# Altium PCB seriesrelay_noprotection.PcbDoc
Units mm, origin at the board's own origin, x right, y up, seen from the top; angles counter-clockwise.
Board outline 40.63 x 56.02 mm, 2 copper layers (Top Layer, Bottom Layer); 8 components, 12 nets, 34 pads, 0 vias.
Unrouted connection lines stored in the file: 2.
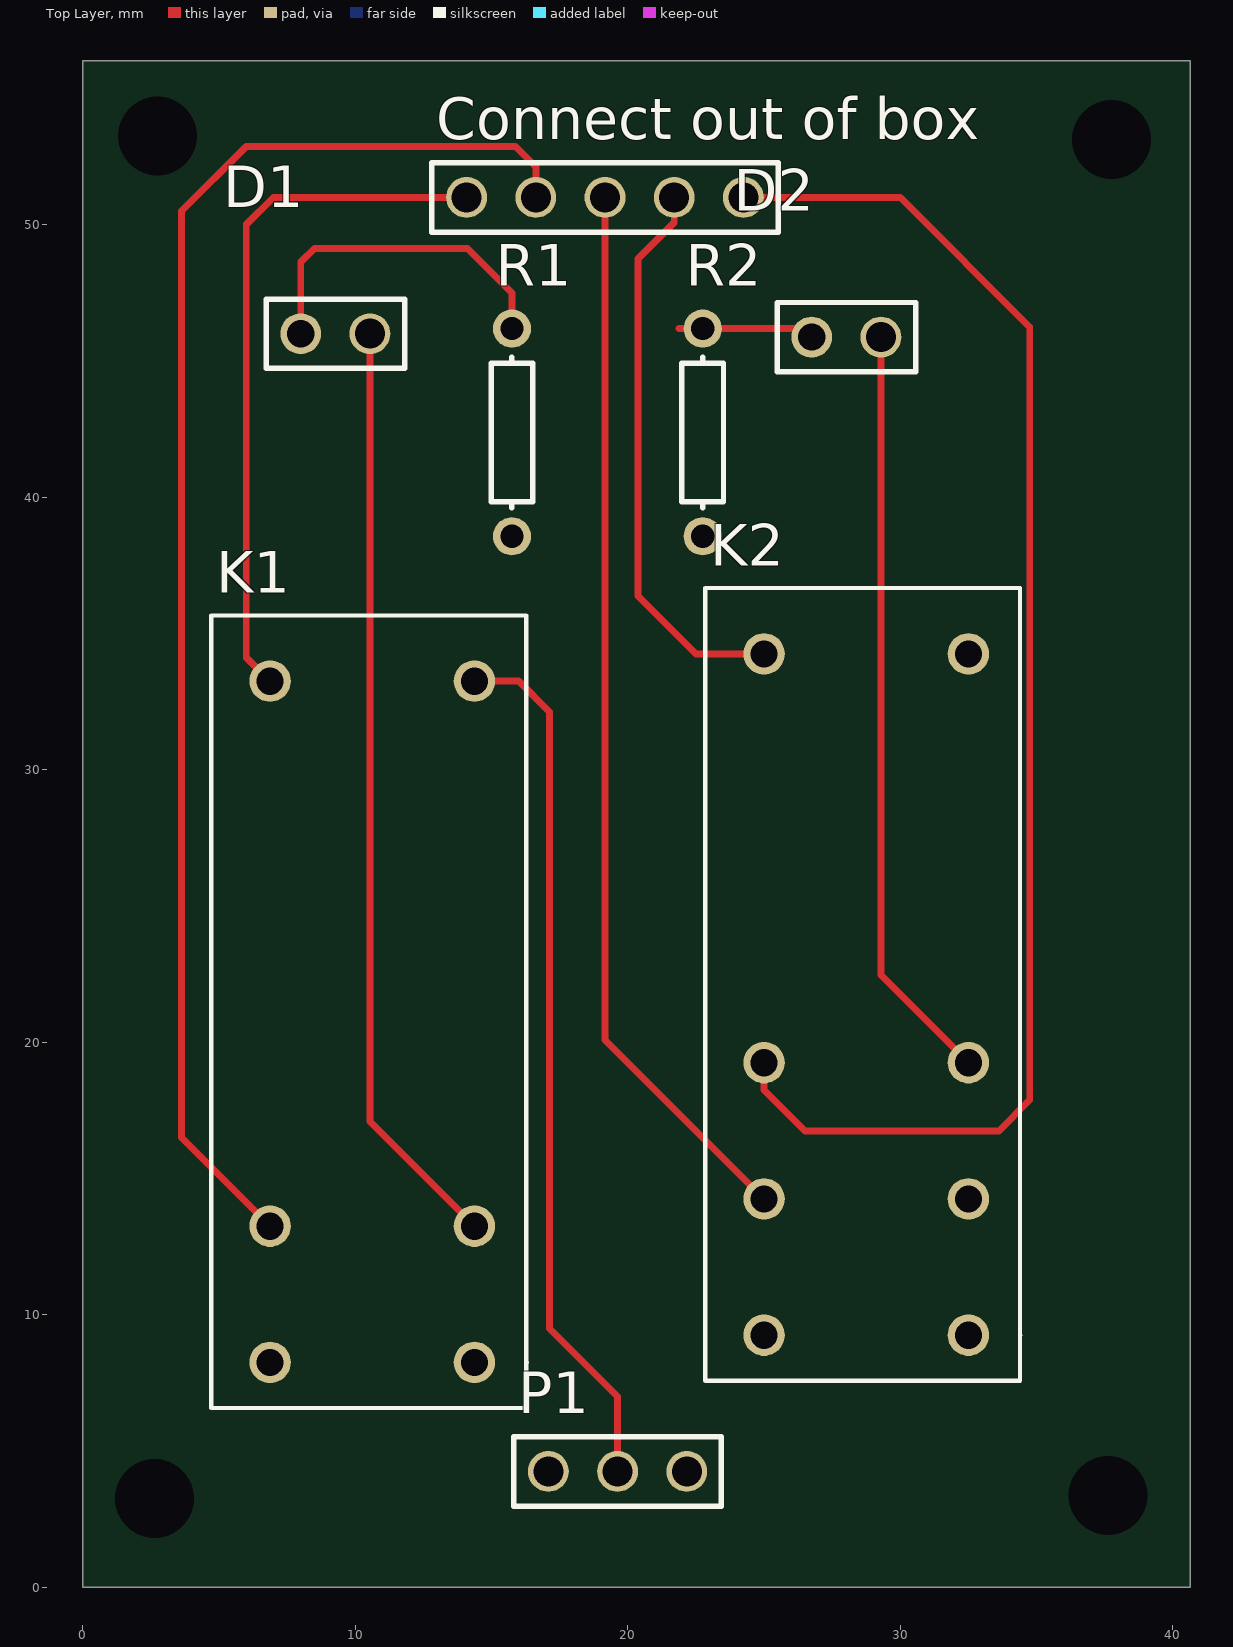
[diagram p0: Top Layer view]
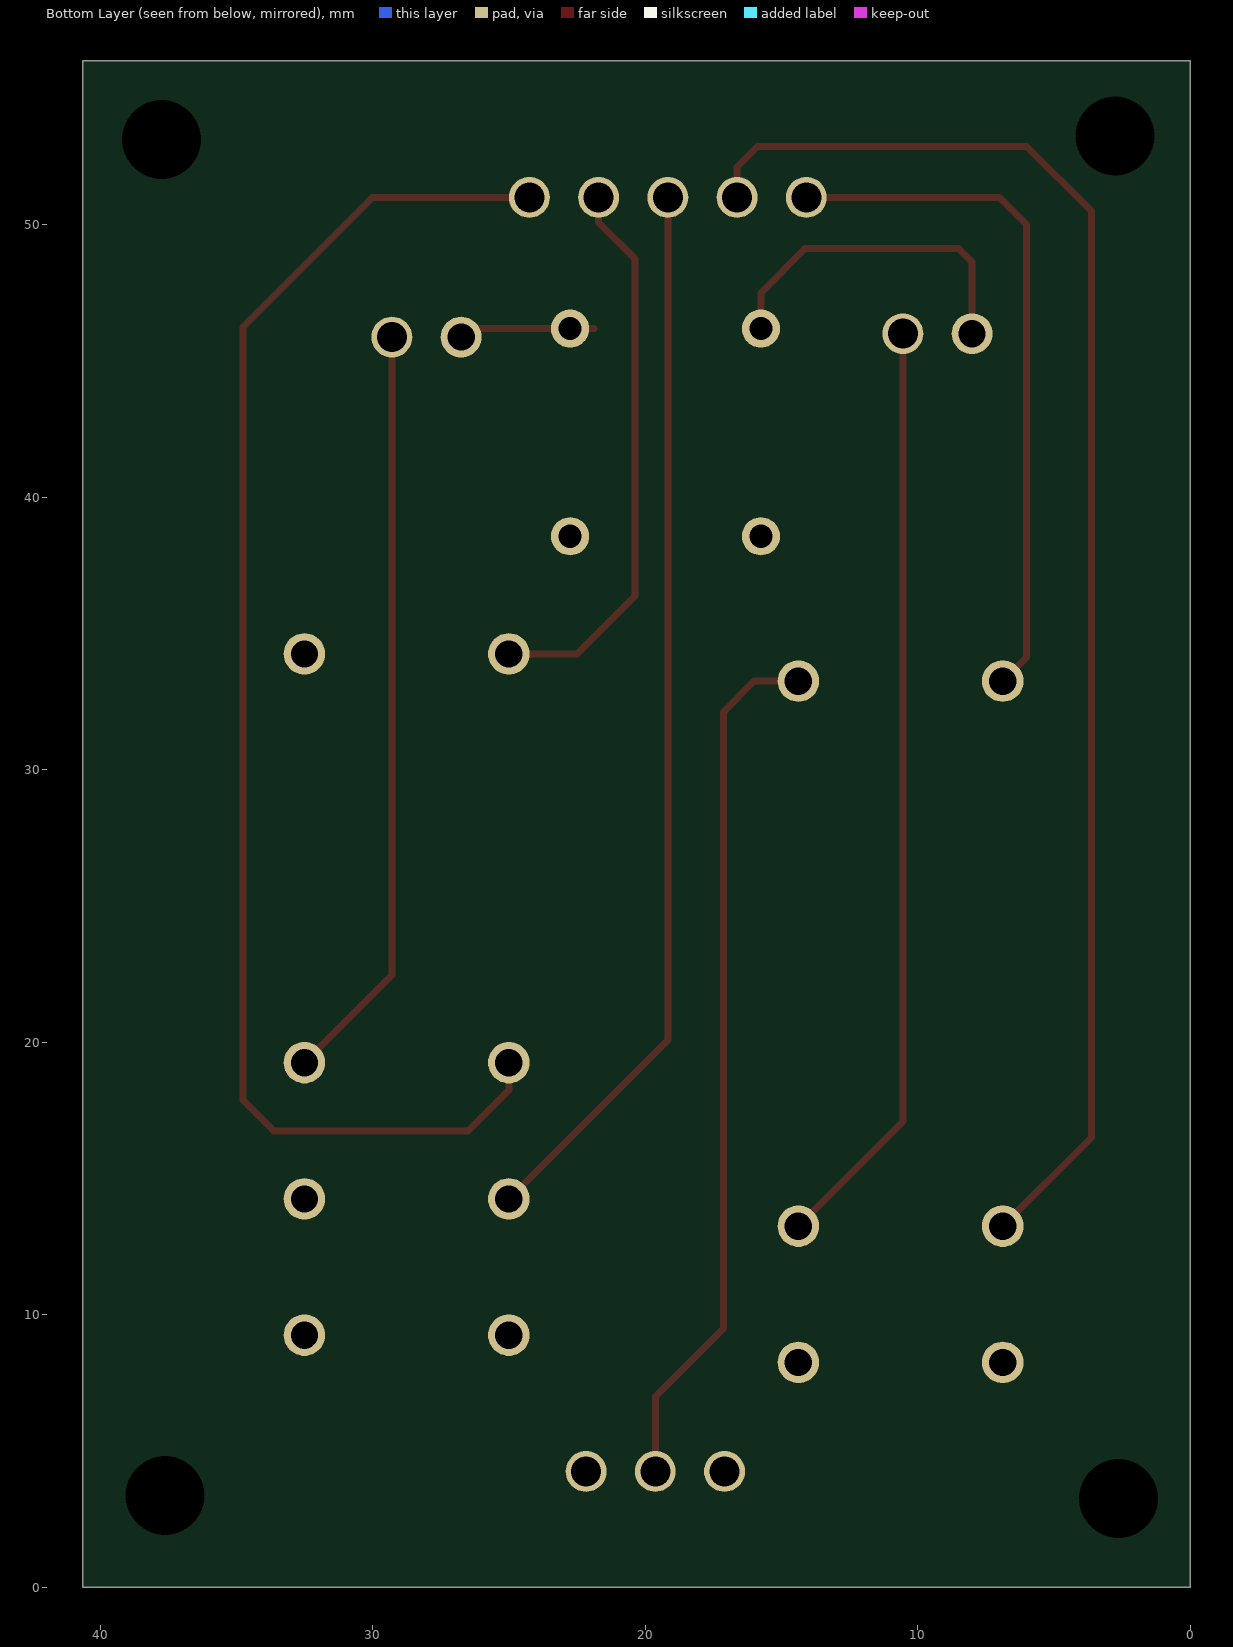
[diagram p1: Bottom Layer view, seen from below]

## Layer stack, top to bottom
Top Solder: solder mask 0.0102, Solder Resist, Dk 3.5
Top Layer: signal copper 0.0356
Dielectric1: dielectric 0.32, FR-4, Dk 4.8
Bottom Layer: signal copper 0.0356
Bottom Solder: solder mask 0.0102, Solder Resist, Dk 3.5

## Board outline
0,0 0,56.016 40.635,56.016 40.635,0

## Design rules (kind name [scope] priority, off if disabled: settings)
Clearance [All] p1: gap=0.254
FabricationTestPointUsage TestPointUsage [All] p1: valid=0 allowmultiple=FALSE
FabricationTestpoint Testpoint [All] p1: side=3 testpointundercomponent=TRUE minsize=1.016 maxsize=2.54 preferedsize=1.524 minholesize=0 maxholesize=1.016 preferedholesize=0.813 testpointgrid=0.025 allowsidetop=TRUE allowsidebottom=TRUE usegrid=TRUE gridtolerance=0
PolygonConnect [All] p1: connectstyle=Relief reliefconductorwidth=0.254 reliefentries=4 polygonreliefangle="90 Angle" airgapwidth=0.254
RoomDefinition series_noprotection [InComponentClass('series_noprotection')] p1: confinementstyle=ConfineIn formatcopy=TRUE lockcomponents=FALSE outline 55,1.19 160,1.19 160,35 55,35
RoutingVias [All] p1: holewidth=0.711 width=1.27 viastyle="Through Hole" minholewidth=0.711 minwidth=1.27 maxholewidth=0.711 maxwidth=1.27
SilkToSolderMaskClearance SilkscreenOverComponentPads [IsPad] p1: minsilkscreentomaskgap=0.254 clearancetoexposedcopper=TRUE
SolderMaskExpansion [All] p1: expansion=0.102
Width [All] p1: maxlimit=0.254 minlimit=0.254 preferedwidth=0.254
27 further rules are at their usual default settings.

## Components (designator, comment, footprint, x,y, rotation, side; value= is the part's Value field where it differs from the comment)
"Connect out of box" "Header 5_custom" TE5 14.085,51 r0 top
D1 "LED_custom" LED_Custom 8,46 r0 top
D2 "LED_custom" LED_Custom 26.75,45.875 r0 top
K1 "Relay-DPST_custom" Relay-DPST_custom -1131.045,-1189.887 r0 top
K2 "Relay-DPDT_custom" Relay-DPDT_custom -1112.92,-1188.887 r0 top
P1 "Header 3_custom" TB3 22.165,4.25 r180 top
R1 "Res1" AXIAL-0.3 15.75,42.375 r270 top
R2 "Res1" AXIAL-0.3 22.75,42.375 r270 top

## Footprints (in the part's own frame and the unit in brackets; to place one, negate y for a bottom-side part, rotate by r counter-clockwise, add the part's x,y. Pads: shape width x height; smd on the part's side, far side on the other; paste and mask are expansions set on the pad)
AXIAL-0.3 [mm] "Axial Device, Thru-Hole; 2 Leads; 0.3 in Pin Spacing"
  round 1.4 hole 0.85: 1(-3.81,0) 2(3.81,0)
  silkscreen extent -2.77,-0.76 2.77,0.76
LED_Custom [mm] "LED-round pins"
  round 1.5 hole 1: 1(0,0)
  round 1.5 hole 1.1: 2(2.54,0)
  silkscreen extent -1.27,-1.27 3.81,1.27
Relay-DPDT_custom [mil]
  round 60 hole 39.37: 1(44800,48155) 2(44800,47564.45) 3(44800,47367.6) 4(44800,47170.75) 5(45095.28,47170.75) 6(45095.28,47367.6) 7(45095.28,47564.45) 8(45095.28,48155)
  silkscreen extent 44715,47105 45171,48250
Relay-DPST_custom [mil]
  round 60 hole 39.37: 1(44800,48155) 2(44800,47367.6) 3(44800,47170.75) 4(45095.28,47170.75) 5(45095.28,47367.6) 6(45095.28,48155)
  silkscreen extent 44715,47105 45171,48250
TB3 [mm] "Connector; terminalbock; 3 Position"
  round 1.5 hole 1.1: 1(0,0) 2(2.54,0) 3(5.08,0)
  silkscreen extent -1.27,-1.27 6.35,1.27
TE5 [mm] "Connector; Terminalblock; 5 Position"
  round 1.5 hole 1.1: 1(0,0) 2(2.54,0) 3(5.08,0) 4(7.62,0) 5(10.16,0)
  silkscreen extent -1.27,-1.27 11.43,1.27

## Part data
"Connect out of box": "Header, 5-Pin"
D1 D2: "Typical INFRARED GaAs LED"
K1: "Dual-Pole Single-Throw Relay"
K2: "Dual-Pole Dual-Throw Relay"
P1: "Header, 3-Pin"
R1 R2: "Resistor"

## Free pads (board coordinates)
  round 1.524 hole 2.9: 2(37.75,53.125) 3(37.625,3.375) 6(2.625,3.25) 7(2.75,53.25)

## Nets (pads, with @x,y where several pads share a name; then routed paths per layer and width w, separated by ;. In a path a pad name is that pad's centre, name@x,y a point inside that pad or via, vN(x,y) a via of type N, cw(c..) or ccw(c..) an arc to the next point about the centre after c; other vN are vias at no path point)
"NetConnect out of box_1": "Connect out of box.1" K1.1 | length 25.6
  Top Layer w0.254: K1.1 6,34.125 6,50 7,51 14.085,51
"NetConnect out of box_2": "Connect out of box.2" K1.2 | length 54
  Top Layer w0.254: K1.2 3.625,16.5 3.625,50.5 6,52.875 15.875,52.875 16.625,52.125 16.625,51
"NetConnect out of box_3": "Connect out of box.3" K2.3 | length 39.2
  Top Layer w0.254: 19.165,51 19.165,20.085 K2.3
"NetConnect out of box_4": "Connect out of box.4" K2.1 | length 20.7
  Top Layer w0.254: 21.705,51 21.705,50.08 20.375,48.75 20.375,36.375 22.5,34.25 K2.1
"NetConnect out of box_5": "Connect out of box.5" K2.2 | length 52.7
  Top Layer w0.254: 24.245,51 30,51 34.75,46.25 34.75,17.875 33.625,16.75 26.5,16.75 25,18.25 K2.2
NetD1_1: D1.1 R1.1 | length 12.6
  Top Layer w0.254: D1.1 8,48.625 8.5,49.125 14.125,49.125 15.75,47.5 R1.1
NetD1_2: D1.2 K1.5 | length 34.3
  Top Layer w0.254: D1.2 10.54,17.085 K1.5
NetD2_1: D2.1 R2.1 | length 5
  Top Layer w0.254: 21.875,46.185 R2.1 26.44,46.185 D2.1
NetD2_2: D2.2 K2.7 | length 28
  Top Layer w0.254: D2.2 29.29,22.46 K2.7
NetK1_6: K1.6 P1.2 | length 32.1
  Top Layer w0.254: K1.6 16,33.25 17.125,32.125 17.125,9.5 19.625,7 P1.2
NetP1_1: P1.1 R2.2
NetP1_3: P1.3 R1.2
pads on no net: K1.3 K1.4 K2.4 K2.5 K2.6 K2.8

## Silkscreen, mask and mechanical layers (free items; w line width, h text height)
Mechanical 16:
  drawing of 1874 lines, arcs and shapes, not listed
  text "1" at -94.921,114.493 h1.78
  text "2" at -22.277,114.493 h1.78
  text "3" at 50.875,114.493 h1.78
  text "4" at 123.773,114.493 h1.78
  text "A" at -129.262,91.481 h1.78
  text "A" at 157.758,91.481 h1.78
  text "B" at -129.262,43.424 h1.78
  text "B" at 144.005,39.812 h1.78
  text "C" at -129.262,-5.09 h1.78
  text "C" at 157.758,-5.09 h1.78
  text "ENGINEER:" at 42.823,-42.098 h1.14
  text "TITLE:" at 80.923,-42.098 h1.14
  text "PCB DESIGNER:" at 42.823,-49.591 h1.14
  text "D" at -129.262,-53.096 h1.78
  text "D" at 157.758,-53.096 h1.78
  text "DATE:" at 42.823,-57.338 h1.14
  text "PART NO.:" at 80.923,-57.338 h1.14
  text "REV:" at 134.263,-57.338 h1.14
  text "Altium Limited" at 9.803,-59.878 h1.78
  text ".PRINT_DATE" at 44.093,-60.386 h1.78
  text "12a Rodborough Rd" at 9.803,-62.418 h1.78
  text "Frenchs Forest" at 9.803,-64.958 h1.78
  text "FILE NAME:" at 42.823,-64.958 h1.14
  text "DWG NO:" at 80.923,-64.958 h1.14
  text "SCALE:" at 134.263,-64.958 h1.14
  text "NSW 2086" at 9.803,-67.498 h1.78
  text ".PCB_FILE_NAME_NO_PATH" at 44.093,-68.006 h1.78
  text "1" at -94.921,-73.467 h1.78
  text "2" at -22.277,-73.467 h1.78
  text "3" at 50.875,-73.467 h1.78
  text "4" at 123.773,-73.467 h1.78